# Altium PCB Nixie Valve Clock Power Supply Daughterboard.PcbDoc (part 1 of 2)
Units mm, origin at the board's own origin, x right, y up, seen from the top; angles counter-clockwise.
Board outline 55 x 51 mm, 2 copper layers (Top Layer, Bottom Layer), stack 1.57 mm thick; 45 components, 21 nets, 192 pads, 92 vias.
Unrouted connection lines stored in the file: 89.
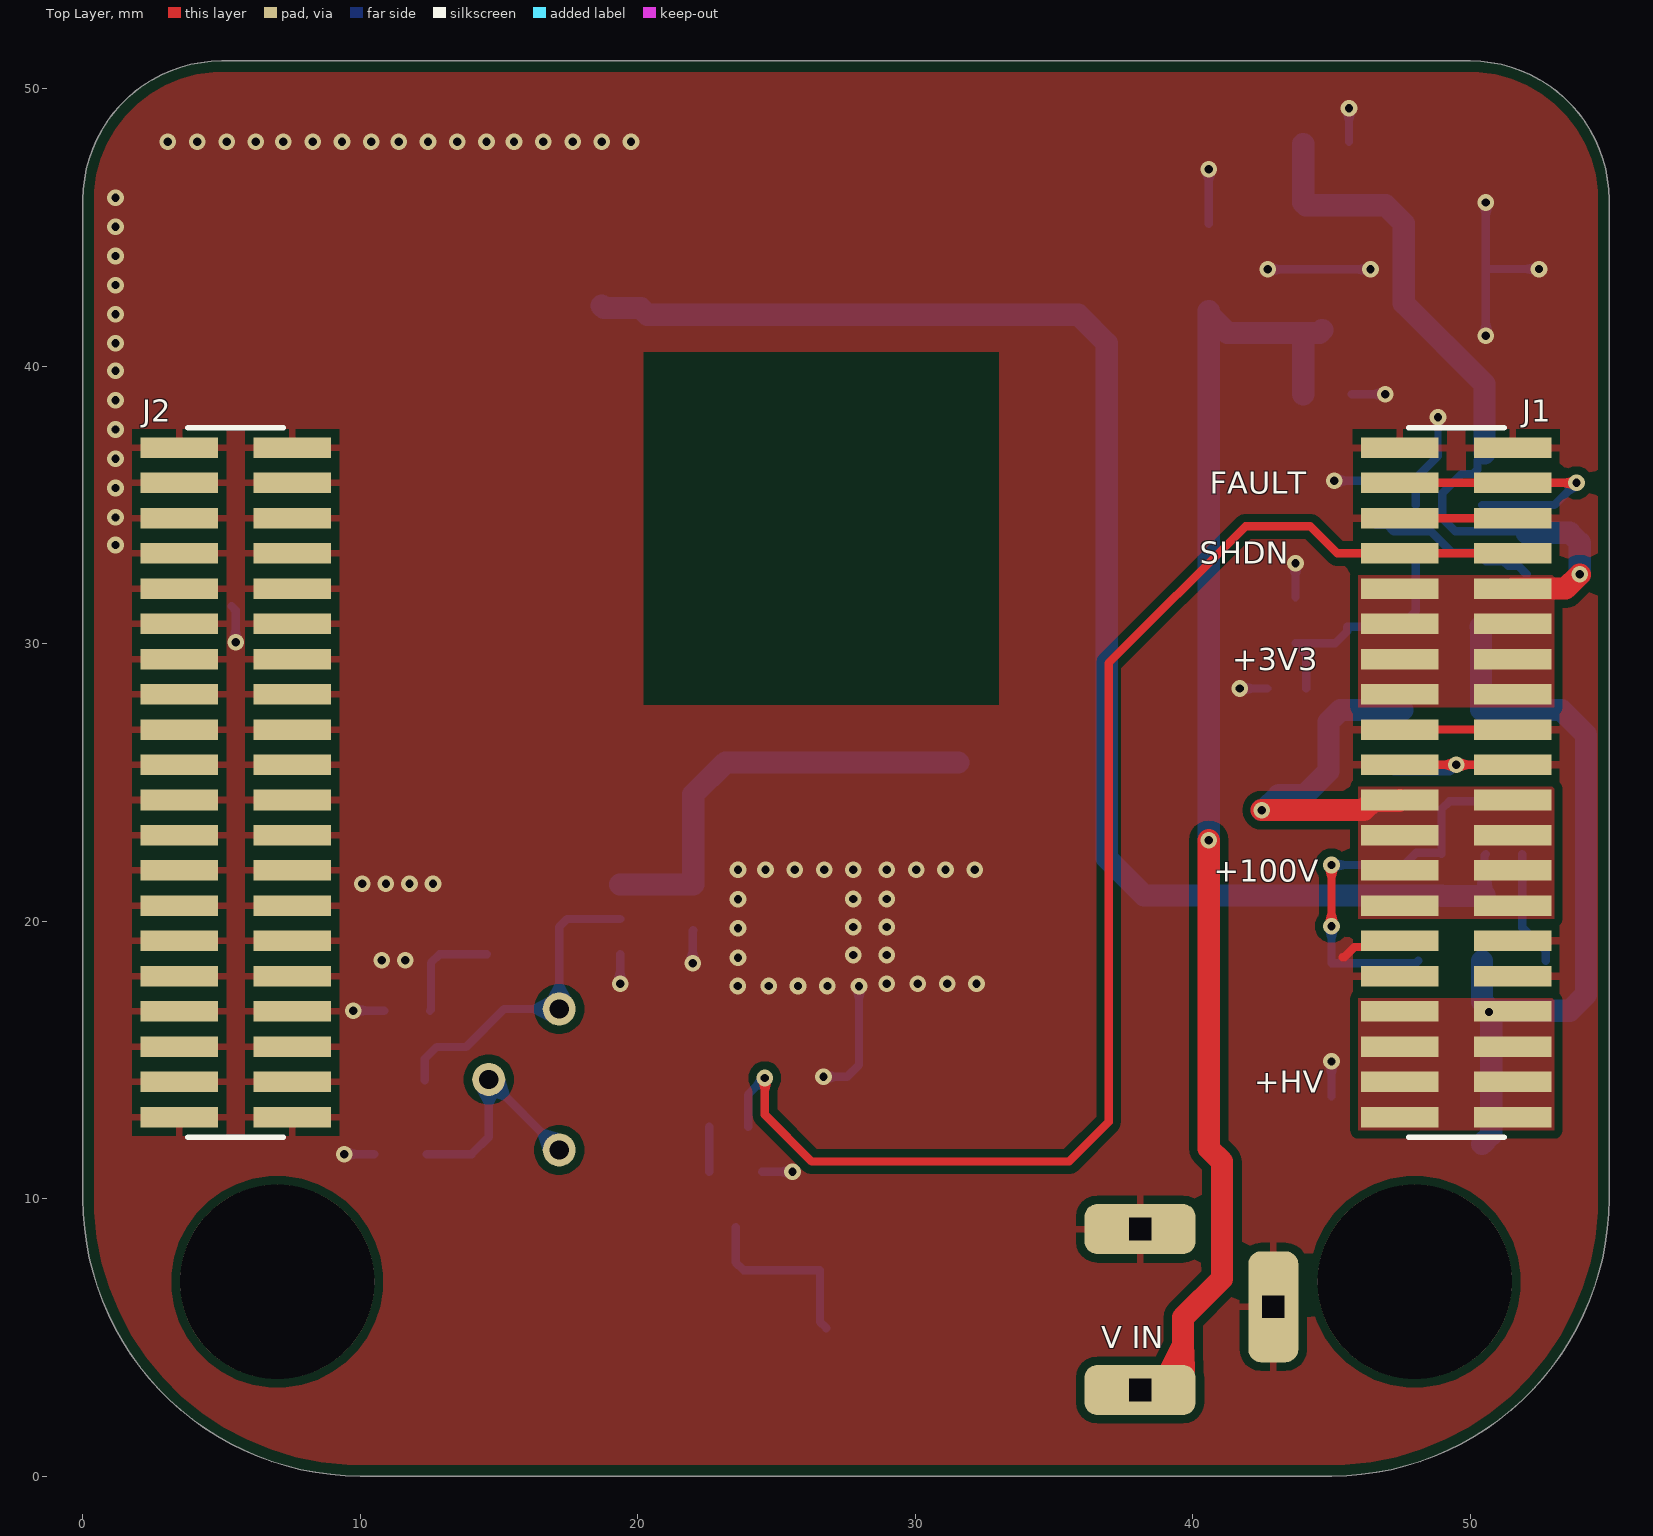
[diagram p0: Top Layer view]
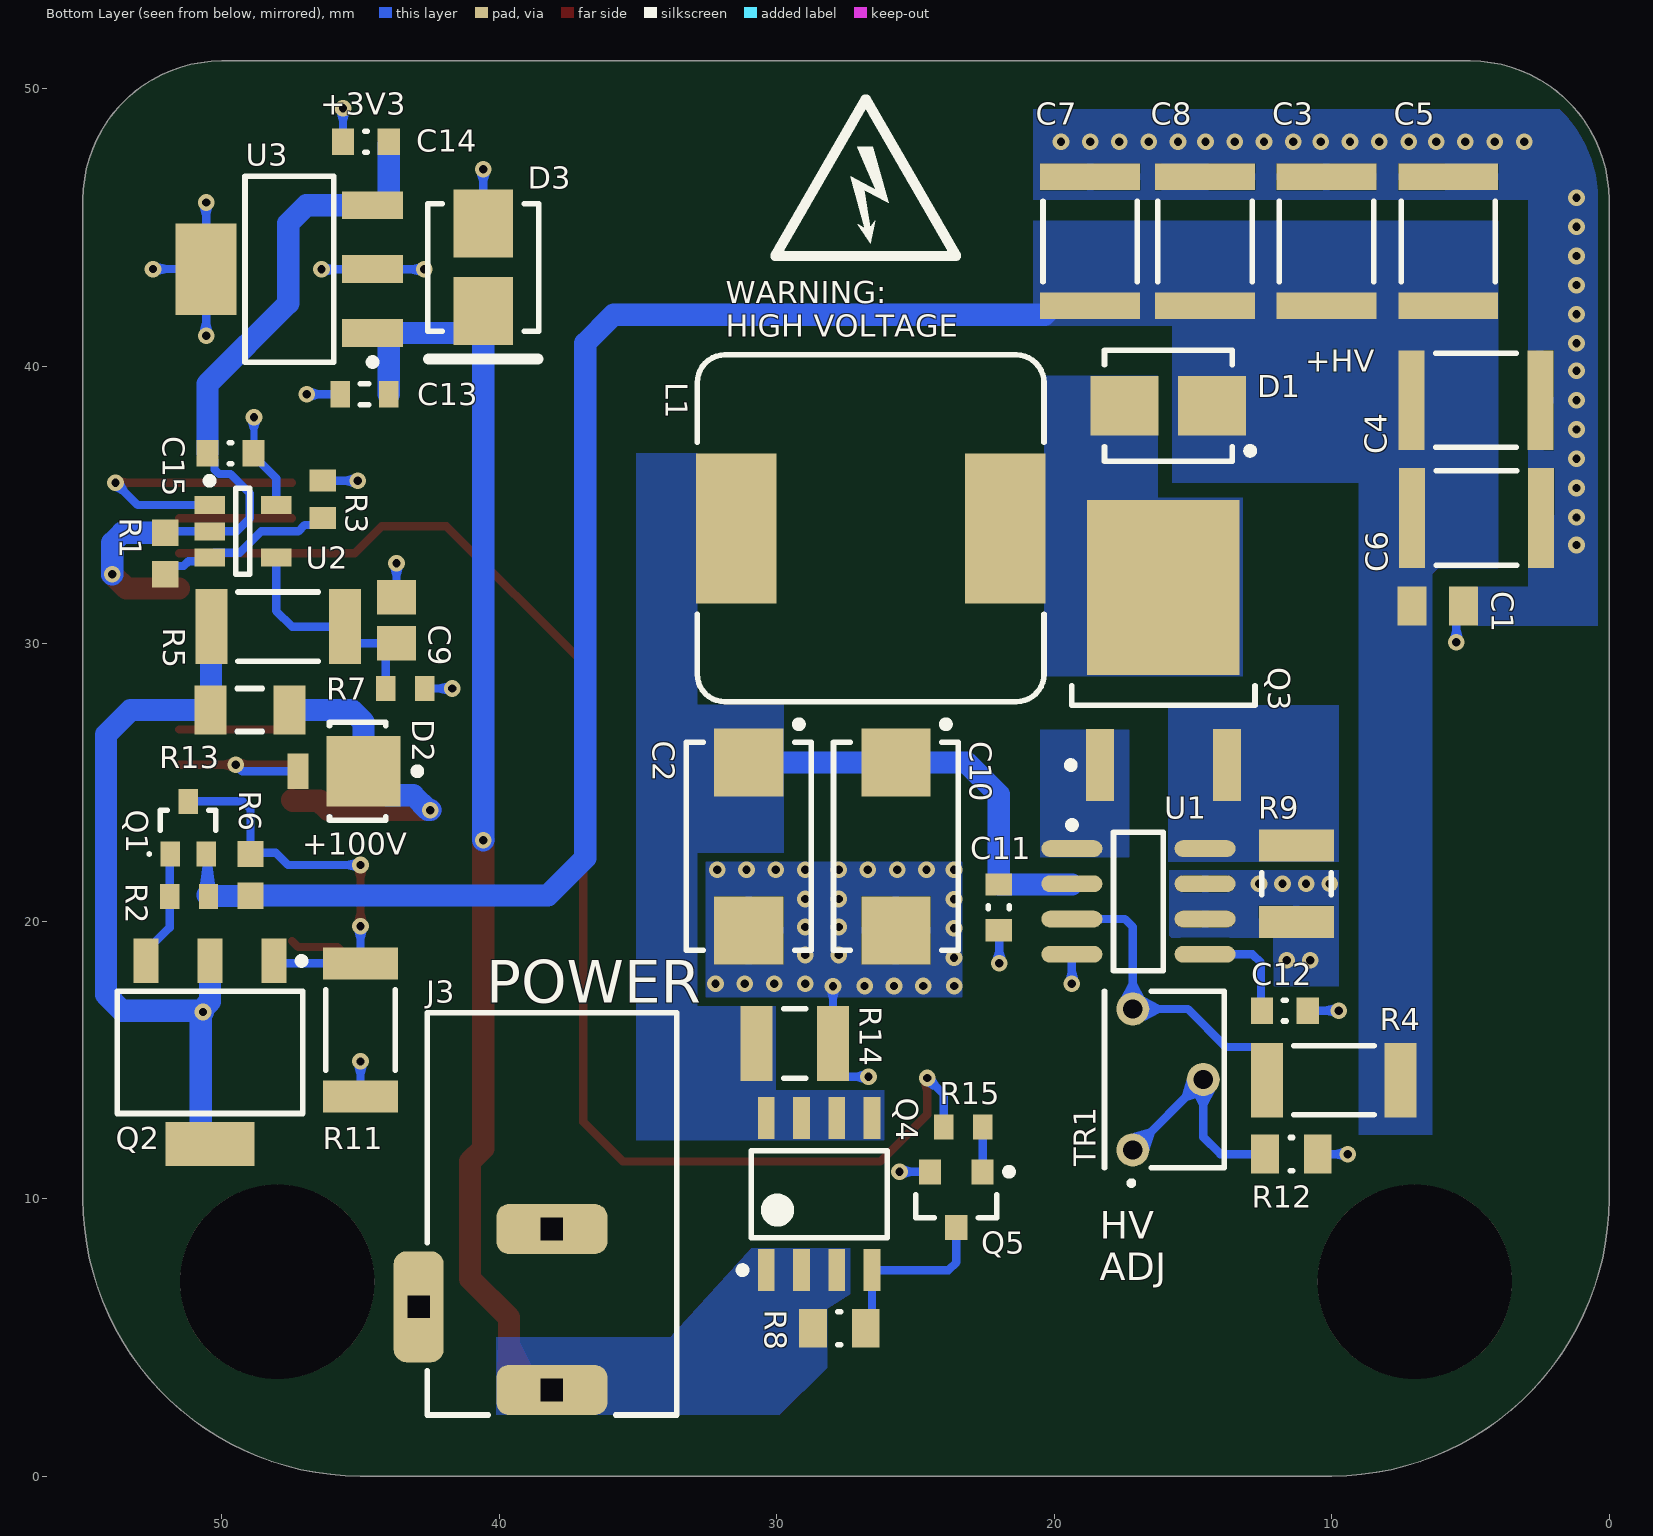
[diagram p1: Bottom Layer view, seen from below]
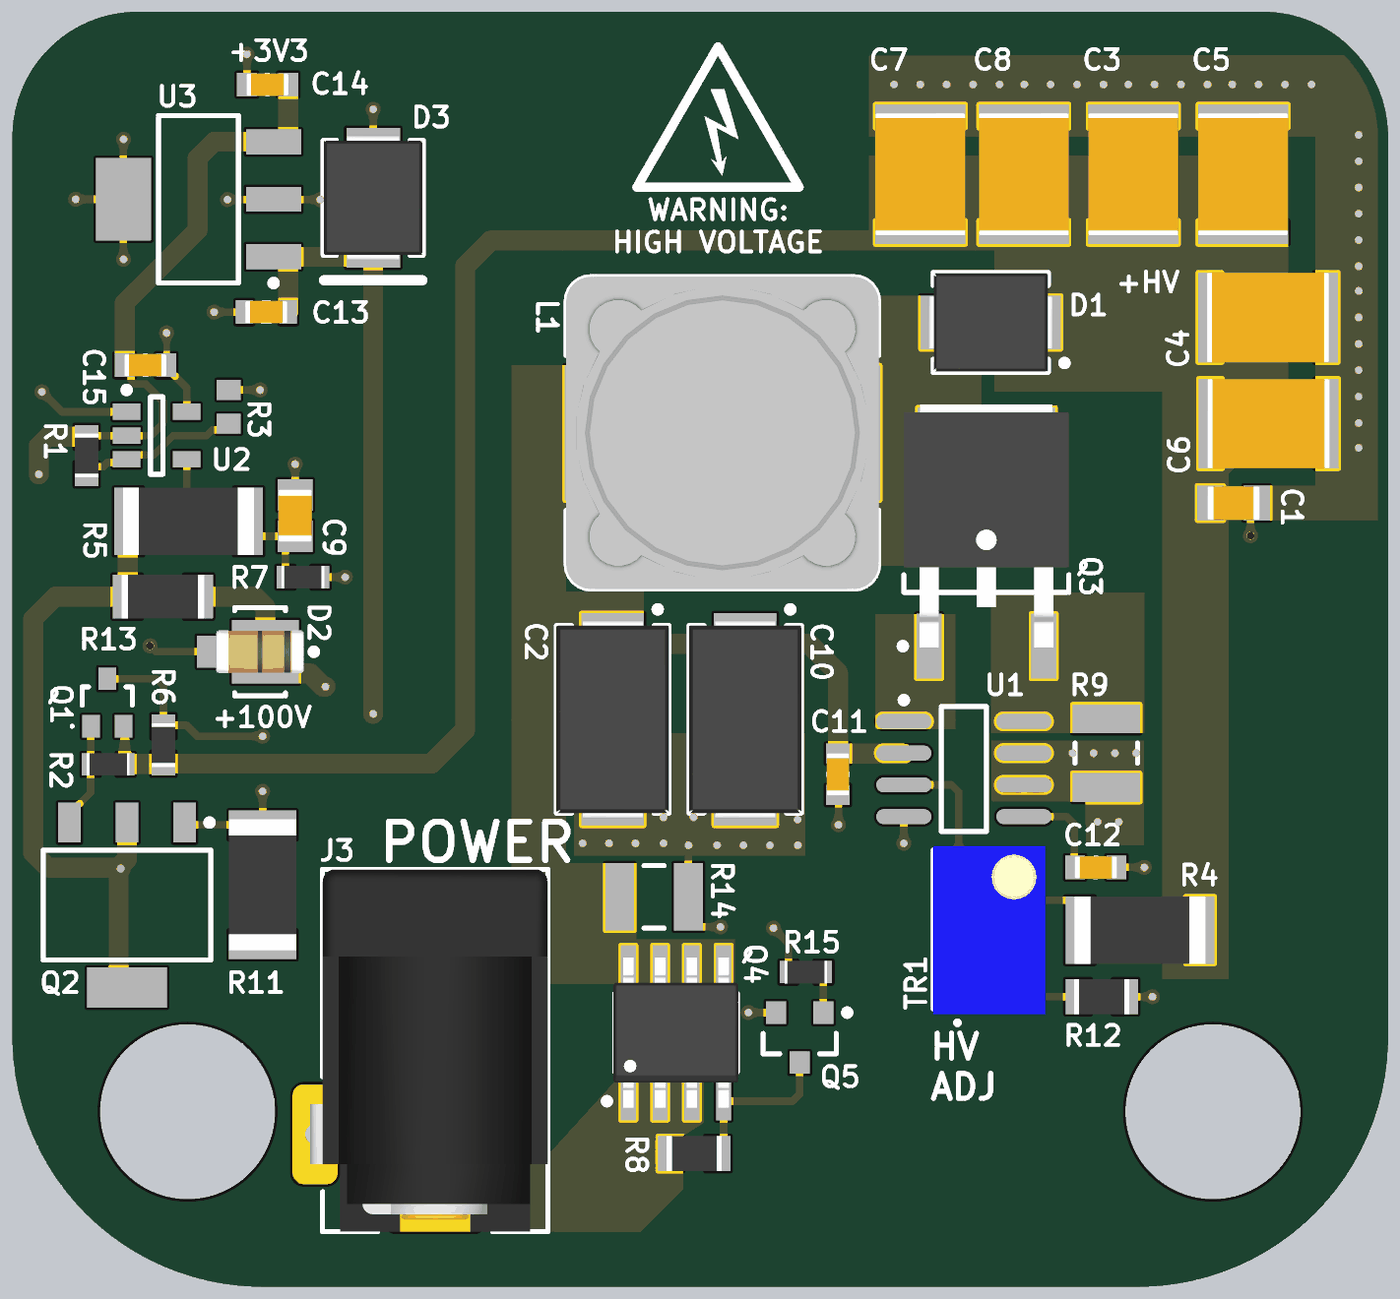
[diagram p2: 3D render of the assembled board from below, using the file's embedded part models]

## Layer stack, top to bottom
Top Solder: solder mask 0.01, SM-001, Dk 4
Top Layer: signal copper 0.035
Dielectric 1: core 1.5, Core-043, Dk 4.3
Bottom Layer: signal copper 0.035
Bottom Solder: solder mask 0.01, SM-001, Dk 4

## Board outline
10,0 45,0 ccw(c45,10) 55,10 55,46 ccw(c50,46) 50,51 5,51 ccw(c5,46) 0,46 0,10 ccw(c10,10)

## Design rules (kind name [scope] priority, off if disabled: settings)
BoardOutlineClearance [All] p1: gap=0.4 ignorepadtopadclearanceinfootprint=FALSE
Clearance Clearance_GND_PLANES [InPoly AND InNet('GND')] p1: gap=0.3 ignorepadtopadclearanceinfootprint=FALSE
Clearance Clearance_HV [InNetClass('HIGH VOLTAGE')] p2: gap=0.4 ignorepadtopadclearanceinfootprint=FALSE
Clearance Clearance_HV_100V [InNetClass('HIGH VOLTAGE 100V')] p3: gap=0.4 ignorepadtopadclearanceinfootprint=FALSE
Clearance Clearance_NPTH_to_Track [IsThruPin AND NOT(PadIsPlated) vs IsTrack] p4: gap=0.2 ignorepadtopadclearanceinfootprint=FALSE
Clearance Clearance_PTH_to_Track [IsTrack vs IsThruPin AND PadIsPlated] p5: gap=0.28 ignorepadtopadclearanceinfootprint=FALSE
Clearance Clearance_Via_to_Track [IsVia vs IsTrack] p6: gap=0.2 ignorepadtopadclearanceinfootprint=FALSE
Clearance Clearance_SMD_Pad_to_SMD_Pad [IsPad AND NOT(IsThruPin) vs IsPad AND NOT(IsThruPin)] p7: gap=0.15 ignorepadtopadclearanceinfootprint=FALSE
Clearance Clearance_Pad_to_Track [IsPad vs IsTrack] p8: gap=0.1 ignorepadtopadclearanceinfootprint=FALSE
Clearance Clearance_Inner_Cu_to_PTH [OnLayer('Inner 1') OR OnLayer('Inner 2') vs IsThruPin AND PadIsPlated] p9: gap=0.1 ignorepadtopadclearanceinfootprint=FALSE
Clearance Clearance_Inner_Cu_to_Vias [IsVia vs OnLayer('Inner 1') OR OnLayer('Inner 2')] p10: gap=1.95 ignorepadtopadclearanceinfootprint=FALSE
Clearance Clearance_Same_Nets [IsTrack vs IsTrack] p11: gap=0.25 ignorepadtopadclearanceinfootprint=FALSE
Clearance Minimum_Clearance [All] p12: gap=0.1 ignorepadtopadclearanceinfootprint=FALSE
HoleSize "Minimum Hole Size PTH" [(IsThruPin AND IsPad And PadIsPlated)] p1: absolutevalues=TRUE maxlimit=5 minlimit=0.3 maxpercent=80.000 minpercent=20.000
HoleSize "Minimum Hole Size VIA" [IsVia] p2: absolutevalues=TRUE maxlimit=5 minlimit=0.15 maxpercent=80.000 minpercent=20.000
HoleSize "Minimum Hole Size NPTH" [(IsThruPin AND IsPad And (NOT PadIsPlated))] p3: absolutevalues=TRUE maxlimit=10 minlimit=0.5 maxpercent=80.000 minpercent=20.000
HoleToHoleClearance ViaHoleToHoleClearance [IsVia vs IsVia] p1: gap=0.2 allowstackedmicrovias=TRUE
HoleToHoleClearance PadHoleToHoleClearance [IsPad vs IsPad] p2: gap=0.45 allowstackedmicrovias=TRUE
MinimumAnnularRing PTH_MinimumAnnularRing [(IsThruPin AND IsPad And PadIsPlated)] p1: minimumring=0.2
MinimumAnnularRing VIA_MinimumAnnularRing [IsVia] p2: minimumring=0.05
MinimumAnnularRing NPTH_MinimumAnnularRing [(IsThruPin AND IsPad And (NOT PadIsPlated))] p3: minimumring=0.45
MinimumSolderMaskSliver [All] p1: minsoldermaskwidth=0.1
PolygonConnect PolygonConnect_VIAS [IsVia] p1: connectstyle=Direct reliefconductorwidth=0.254 reliefentries=4 polygonreliefangle="90 Angle" airgapwidth=0.254
PolygonConnect [IsPoly AND NOT(InNet('GND'))] p2: connectstyle=Direct reliefconductorwidth=0.254 reliefentries=4 polygonreliefangle="90 Angle" airgapwidth=0.254
PolygonConnect PolygonConnect_Thermal_Relief [IsPoly AND (InNet('GND')) vs NOT(InComponent('C2') OR InComponent('C10') OR InComponent('C3') OR InComponent('C5') OR InComponent('C7') OR InComponent('C8') OR InComponent('C6') OR InComponent('C4') OR InComponent('U1') OR InComponent('R9') OR InComponent('C1'))] p3: connectstyle=Relief reliefconductorwidth=0.254 reliefentries=4 polygonreliefangle="90 Angle" airgapwidth=0.3
RoutingVias [All] p1: holewidth=0.3 width=0.6 viastyle="Through Hole" minholewidth=0.3 minwidth=0.6 maxholewidth=2 maxwidth=3
SilkToSilkClearance [All] p1: silktosilkclearance=0.1
SilkToSolderMaskClearance [All] p1: minsilkscreentomaskgap=0 clearancetoexposedcopper=FALSE
SolderMaskExpansion SolderMaskExpansion_Tented_Vias [IsVia] p1: expansion=0.1 istentingtop=TRUE
SolderMaskExpansion [All] p2: expansion=0.1 istentingtop=FALSE
SupplyNets "Schematic Supply Nets_4" [InNet('GND')] p1: voltage=0.000
SupplyNets "Schematic Supply Nets_2" [InNet('+3V3')] p2: voltage=0.000
SupplyNets "Schematic Supply Nets_3" [InNet('+9V')] p3: voltage=0.000
SupplyNets "Schematic Supply Nets_1" [InNet('+HV')] p4: voltage=0.000
SupplyNets "Schematic Supply Nets" [InNet('+100V')] p5: voltage=0.000
Width "Minimum Width" [All] p1: maxlimit=3 minlimit=0.1 preferedwidth=0.3
25 further rules are at their usual default settings.

## Classes and differential pairs
net class HV_Nets: CS EXT FB NetC9_1 NetQ1_1 NetQ1_3 NetQ4_4 NetQ5_1 NetR1_1 NetR12_2 REF SW_NODE VBOOST VIN
net class "HIGH VOLTAGE 100V": +100V
net class POWER: +3V3 GND
net class "HIGH VOLTAGE": +HV NetQ1_1 NetQ1_3 SW_NODE VBOOST
component class POWER: C13 C14 D3 J3 U3
component class "Nixie Valve Clock Power Supply Daughterboard": J1 J2
component class HV: C1 C2 C3 C4 C5 C6 C7 C8 C9 C10 C11 C12 C15 D1 D2 L1 Q1 Q2 Q3 Q4 Q5 R1 R2 R3 R4 R5 R6 R7 R8 R9 R11 R12 R13 R14 R15 TR1 U1 U2

## Components (designator, comment, footprint, x,y, rotation, side; value= is the part's Value field where it differs from the comment)
C1 "CC0805KKX7RYBB104" CAPC2013X95X50NL10T25-Wider-Spacing 6.175,31.351 r180 bottom value=100nF
C2 "TPSD107M016R0125" CAPMP7344X31N 31,22.695 r270 bottom value=100µF
C3 "CGA8P3X7T2E105K250KA" CAPC4532X28N 10.185,44.5 r90 bottom value=1µF
C4 "CGA8P3X7T2E105K250KA" CAPC4532X28N 4.796,38.773 r180 bottom value=1µF
C5 "CGA8P3X7T2E105K250KA" CAPC4532X28N 5.796,44.5 r90 bottom value=1µF
C6 "CGA8P3X7T2E105K250KA" CAPC4532X28N 4.775,34.525 r180 bottom value=1µF
C7 "CGA8P3X7T2E105K250KA" CAPC4532X28N 18.7,44.5 r90 bottom value=1µF
C8 "CGA8P3X7T2E105K250KA" CAPC4532X28N 14.559,44.5 r90 bottom value=1µF
C9 "CC0805KKX7RYBB104" CAPC2013X95X50NL10T25 43.698,30.844 r90 bottom value=100nF
C10 "TPSD106K035R0300" CAPMP7344X31N 25.7,22.695 r270 bottom value=10µF
C11 "CGA3E2X7R1H104K080AA" CAPC1608X09N 21.995,20.496 r270 bottom value=100nF
C12 "CGA3E2X7R1H104K080AA" CAPC1608X09N 11.684,16.775 r180 bottom value=100nF
C13 "C1608X7R1H334K080AC" CAPC1608X10N 44.851,38.987 r0 bottom value=330nF
C14 "CGA3E2X7R1H104K080AA" CAPC1608X09N 44.801,48.087 r0 bottom value=100nF
C15 "CGA3E2X7R1H104K080AA" CAPC1608X09N 49.684,36.861 r180 bottom value=100nF
D1 "ES2F-E3/5BT" DIOM4336X24N 15.884,38.575 r0 bottom
D2 "1PMT4135E3/TR7" FP-DO-216-MFG 45.1,25.4 r0 bottom
D3 "SS54BF-HF" JCET-SMB-2_N 40.576,43.562 r270 bottom
J1 "FTS-120-X-X-DV" SAMTEC_FTS-120-X-X-DV 49.5,25 r90 top locked
J2 "FTS-120-X-X-DV" SAMTEC_FTS-120-X-X-DV 5.5,25 r90 top locked
J3 "694106301002" 694106301002 38.1,9.45 r0 bottom
L1 "SRR1280-101M" BOUR-SRR1280-2_V 26.613,34.156 r180 bottom value=100µH
Q1 "BC807-25WT1G" ONSC-SC-70-3-419-04_V 51.211,23.368 r90 bottom
Q2 "BSP317PH6327XTSA1" INF-PG-SOT223_SC-73_N 50.422,15.266 r270 bottom
Q3 "STD18NF25" DPAK229P972X240-3N 16.059,29.775 r90 bottom
Q4 "SI4459BDY-T1-GE3" SI4459BDY-T1-GE3-Footprint-1 28.47,10.16 r90 bottom
Q5 "BC817-25-TP" SOT95P237X110-3N 23.525,9.965 r270 bottom
R1 "ERJ3EKF1202V" RESC1609X55X30NL15T15 52.035,33.247 r90 bottom value=12k
R2 "AC0603FR-077R5L" RESC1608X55X25NL10T15 51.176,20.895 r0 bottom value=7R5
R3 "ERJ3EKF2002V" RESC1608X55X30NL15T15 46.354,35.2 r270 bottom value=20k
R4 "CRMA2010AF1M50FKEF" RESC5125X07N 9.92,14.266 r180 bottom value=1.5M
R5 "5-2176330-3" RESC5125X07N 47.963,30.611 r0 bottom value=220kR
R6 "ERJ-3EKF5601V" RESC1609X55X30NL15T15 48.963,21.67 r270 bottom value=5.6k
R7 "ERJ-3RBD3301V" RESC1608X55X25NL10T15 43.387,28.383 r0 bottom value=3K3
R8 "Resistor 10k +/-1% 0805 125 mW" RESC2013X50X35NL15T15 27.741,5.329 r0 bottom value=10k
R9 "RL1210FR-070R025L" RESC3126X65X50NL10T20 11.265,21.345 r90 bottom value=25mR
R11 "5-2176347-6" RESC5125X07N 44.999,16.077 r90 bottom value=390kR
R12 "Resistor 10k +/-1% 0805 125 mW" RESC2013X50X35NL15T15 11.445,11.6 r0 bottom value=10k
R13 "CRCW1206150KFKEA" RESC3216X06N 48.986,27.608 r180 bottom value=150k
R14 "CRCW1210470RFKEAHP" RESC3126X65X50NL10T20 29.345,15.593 r0 bottom value=470R
R15 "Resistor 4k7 +/-1% 0603 100 mW" RESC1608X55X25NL10T15 23.275,12.585 r0 bottom value=4.7k
TR1 "3266W-1-502LF" 3266W-1-502LF-Footprint-1 16.025,14.293 r90 bottom value=5k
U1 "MAX1771CSA+" "Copy of ADI-R-8_N" 16.959,20.71 r180 bottom
U2 "MCP6541RT-I/OT" SOT-23-OT5_N 49.236,34.047 r180 bottom
U3 "UA78M33CDCYG3" SOT-223-DB3_N 47.561,43.5 r0 bottom

## Footprints (in the part's own frame and the unit in brackets; to place one, negate y for a bottom-side part, rotate by r counter-clockwise, add the part's x,y. Pads: shape width x height; smd on the part's side, far side on the other; paste and mask are expansions set on the pad)
3266W-1-502LF-Footprint-1 [mm]
  round 1.19 hole 0.69: 1(-2.54,1.139) 2(0,-1.401) 3(2.54,1.139)
  silkscreen extent -3.81,-2.15 3.17,2.16, body extent -3.39,-2.34 3.31,2.16, height 8.52
694106301002 [mm] "DC Power Jack Right Angled(6.4)"
  rrect50% 4x1.8 hole 0.8 square: 1(0,6.35) 2(0,0.55)
  rrect50% 1.8x4 hole 0.8 square: 3(4.8,3.35)
  silkscreen extent -4.5,-7.25 4.5,7.25, body extent -4.5,-7.25 5,7.25, height 10.75
BOUR-SRR1280-2_V [mm] "SMD, 2-Leads, Body 12.5x12.5mm"
  rect 2.9x5.4 smd: 1(-4.85,0) 2(4.85,0)
  silkscreen extent -6.25,-6.25 6.25,6.25, body extent -6.25,-6.25 6.25,6.25, height 7.51
CAPC1608X09N [mm] "Chip Capacitor, 2-Leads, Body 1.60x0.80mm, IPC Medium Density"
  rect 0.8x0.95 smd: 1(-0.825,0) 2(0.825,0)
  silkscreen extent -0.05,-0.38 0.05,0.38, body extent -0.85,-0.45 0.85,0.45, height 0.9
CAPC1608X10N [mm] "Chip Capacitor, 2-Leads, Body 1.60x0.80mm, IPC Medium Density"
  rect 0.7x0.95 smd: 1(-0.875,0) 2(0.875,0)
  silkscreen extent -0.15,-0.38 0.15,0.38, body extent -0.85,-0.45 0.85,0.45, height 1
CAPC2013X95X50NL10T25 [mm] "Chip Capacitor, 2-Leads, Body 2.10x1.35mm, IPC Medium Density"
  rect 1.25x1.4 smd: 1(-0.825,0) 2(0.825,0)
  body extent -1.05,-0.67 1.05,0.67, height 0.95
CAPC2013X95X50NL10T25-Wider-Spacing [mm] "Chip Capacitor, 2-Leads, Body 2.10x1.35mm, IPC Medium Density"
  rect 1.05x1.4 smd: 1(-0.925,0) 2(0.925,0)
  body extent -1.05,-0.67 1.05,0.67, height 0.95
CAPC4532X28N [mm] "Chip Capacitor, 2-Leads, Body 4.50x3.20mm, IPC Medium Density"
  rect 0.95x3.6 smd: 1(-2.325,0) 2(2.325,0)
  silkscreen extent -1.45,-1.7 1.45,1.7, body extent -2.45,-1.8 2.45,1.8, height 2.8
CAPMP7344X31N [mm] "Molded Capacitor, 2-Leads, Body 7.30x4.35mm, IPC Medium Density"
  rect 2.45x2.5 smd: 1(-3.025,0) 2(3.025,0)
  silkscreen extent -4.52,-2.25 3.75,2.25, body extent -3.97,-2.25 3.97,2.25, height 3.1
"Copy of ADI-R-8_N" [mm] "SOIC, 8-Leads, Body 4.9x3.9mm, Pitch 1.27mm, IPC Medium Density"
  oval 2.2x0.6 smd: 1(-2.4,1.905) 2(-2.4,0.635) 3(-2.4,-0.635) 4(-2.4,-1.905) 5(2.4,-1.905) 6(2.4,-0.635) 7(2.4,0.635) 8(2.4,1.905)
  silkscreen extent -2.53,-2.5 0.9,2.88, body extent -2,-2.5 2,2.5, height 1.75
DIOM4336X24N [mm] "Molded Diode, 2-Leads, Body 4.31x3.62mm, IPC Medium Density"
  rect 2.45x2.15 smd: 1(-1.575,0) 2(1.575,0)
  silkscreen extent -3.07,-2 2.3,2, body extent -2.5,-1.97 2.5,1.97, height 2.44
DPAK229P972X240-3N [mm] "D-PAK, 3-Pads, Body 6.20x6.66mm (max), IPC Medium Density"
  rect 2.6x1 smd: 1(-4.15,2.29) 3(-4.15,-2.29)
  rect 6.3x5.5 smd: 4(2.25,0)
  silkscreen extent -4.27,-3.3 -1.3,3.47, body extent -4.2,-3.3 5.53,3.3, height 2.43
FP-DO-216-MFG [mm]
  rect 2.67x2.54 smd: 1(-0.21,0)
  rect 0.76x1.27 smd: 2(2.145,0)
  silkscreen extent -2.27,-1.77 1.01,1.76, body extent -1.75,-0.85 1.75,0.85, height 1.7
INF-PG-SOT223_SC-73_N [mm] "SOT223, 4-Leads, Body 6.5x3.5mm, Pitch 2.3mm, IPC Medium Density"
  rect 1.6x0.9 smd: 1(-3.3,2.3) 2(-3.3,0) 3(-3.3,-2.3)
  rect 1.6x3.2 smd: 4(3.3,0)
  silkscreen extent -3.42,-3.35 2.2,3.42, body extent -1.85,-3.35 1.85,3.35, height 1.8
JCET-SMB-2_N [mm] "Molded Diode, 2-Leads, Body 4.57x3.94mm"
  rect 2.45x2.15 smd: 1(-1.575,0) 2(1.575,0)
  silkscreen extent -2.3,-2 3.3,2, body extent -2.5,-1.97 2.5,1.97, height 2.44
ONSC-SC-70-3-419-04_V [mm] "SOT23, 3-Leads, Body 2x1.25mm, Pitch 0.65mm"
  rect 0.9x0.7 smd: 1(-0.95,0.65) 2(-0.95,-0.65) 3(0.95,0)
  silkscreen extent -1,-1 0.63,1.45, body extent -0.63,-1 0.63,1, height 1
RESC1608X55X25NL10T15 [mm] "Chip Resistor, 2-Leads, Body 1.70x0.90mm, IPC Medium Density"
  rect 0.7x0.9 smd: 1(-0.7,0) 2(0.7,0)
  body extent -0.85,-0.45 0.85,0.45, height 0.55
RESC1608X55X30NL15T15 [mm] "Chip Resistor, 2-Leads, Body 1.60x0.80mm, IPC Medium Density"
  rect 0.8x0.95 smd: 1(-0.675,0) 2(0.675,0)
  body extent -0.87,-0.48 0.87,0.48, height 0.55
RESC1609X55X30NL15T15 [mm] "Chip Resistor, 2-Leads, Body 1.75x0.95mm, IPC Medium Density"
  rect 0.95x0.95 smd: 1(-0.75,0) 2(0.75,0)
  body extent -0.87,-0.48 0.87,0.48, height 0.55
RESC2013X50X35NL15T15 [mm] "Chip Resistor, 2-Leads, Body 2.2x1.4mm, IPC Medium Density"
  rect 1x1.4 smd: 1(-0.95,0) 2(0.95,0)
  silkscreen extent -0.05,-0.6 0.05,0.6, body extent -1.1,-0.7 1.1,0.7, height 0.5
RESC3126X65X50NL10T20 [mm] "Chip Resistor, 2-Leads, Body 3.10x2.60mm, IPC Medium Density"
  rect 1.15x2.7 smd: 1(-1.375,0) 2(1.375,0)
  silkscreen extent -0.4,-1.25 0.4,1.25, body extent -1.6,-1.35 1.6,1.35, height 0.65
RESC3216X06N [mm] "Chip Resistor, 2-Leads, Body 3.15x1.60mm, IPC Medium Density"
  rect 1.15x1.75 smd: 1(-1.425,0) 2(1.425,0)
  silkscreen extent -0.45,-0.77 0.45,0.77, body extent -1.65,-0.87 1.65,0.87, height 0.6
RESC5125X07N [mm] "Chip Resistor, 2-Leads, Body 5.08x2.54mm, IPC Medium Density"
  rect 1.15x2.7 smd: 1(-2.4,0) 2(2.4,0)
  silkscreen extent -1.45,-1.25 1.45,1.25, body extent -2.62,-1.35 2.62,1.35, height 0.74
SAMTEC_FTS-120-X-X-DV [mm]
  rect 0.74x2.79 smd: 1(-12.065,-2.035) 2(-12.065,2.035) 3(-10.795,-2.035) 4(-10.795,2.035) 5(-9.525,-2.035) 6(-9.525,2.035) 7(-8.255,-2.035) 8(-8.255,2.035) 9(-6.985,-2.035) 10(-6.985,2.035) 11(-5.715,-2.035) 12(-5.715,2.035) 13(-4.445,-2.035) 14(-4.445,2.035) 15(-3.175,-2.035) 16(-3.175,2.035) 17(-1.905,-2.035) 18(-1.905,2.035) 19(-0.635,-2.035) 20(-0.635,2.035) 21(0.635,-2.035) 22(0.635,2.035) 23(1.905,-2.035) 24(1.905,2.035) 25(3.175,-2.035) 26(3.175,2.035) 27(4.445,-2.035) 28(4.445,2.035) 29(5.715,-2.035) 30(5.715,2.035) 31(6.985,-2.035) 32(6.985,2.035) 33(8.255,-2.035) 34(8.255,2.035) 35(9.525,-2.035) 36(9.525,2.035) 37(10.795,-2.035) 38(10.795,2.035) 39(12.065,-2.035) 40(12.065,2.035)
  silkscreen extent -12.79,-1.72 12.79,1.72, body extent -12.7,-2.92 12.7,2.92, height 3.17
SI4459BDY-T1-GE3-Footprint-1 [mm]
  rect 1.52x0.6 smd: 1(-2.74,1.905) 2(-2.74,0.635) 3(-2.74,-0.635) 4(-2.74,-1.905) 5(2.74,-1.905) 6(2.74,-0.635) 7(2.74,0.635) 8(2.74,1.905)
  silkscreen extent -2.86,-2.45 1.57,2.89, body extent -3,-2.5 3,2.5, height 1.75
SOT95P237X110-3N [mm] "SOT23, 3-Leads, Body 2.92x2.37mm, Pitch 0.95mm, IPC Medium Density"
  rect 0.9x0.8 smd: 1(-1,0.95) 2(-1,-0.95) 3(1,0)
  silkscreen extent -1.12,-1.46 0.65,2.02, body extent -0.65,-1.46 0.65,1.46, height 1.11
SOT-23-OT5_N [mm] "SOT23, 5-Leads, Body 2.9x1.7mm, Pitch 0.95mm, Lead Span 2.8mm, IPC Medium Density"
  rect 1.1x0.65 smd: 1(-1.2,0.95) 2(-1.2,0) 3(-1.2,-0.95) 4(1.2,-0.95) 5(1.2,0.95)
  silkscreen extent -1.33,-1.55 0.25,1.95, body extent -0.9,-1.55 0.9,1.55, height 1.45
SOT-223-DB3_N [mm] "SOT223, 4-Leads, Body 6.5x3.5mm, Pitch 2.3mm, Lead Span 7mm, IPC Medium Density"
  rect 2.2x1 smd: 1(-3,2.3) 2(-3,0) 3(-3,-2.3)
  rect 2.2x3.3 smd: 4(3,0)
  silkscreen extent -3.12,-3.35 1.6,3.47, body extent -1.85,-3.35 1.85,3.35, height 1.8

## Part data
C1 C9: library part CMP-00390-2, "Ceramic Capacitor, Ceramic, 250V, 10% +Tol, 10% -Tol, X7R, 15% TC, 0.1uF, Surface Mount, 0805", Case/Package=0805, Dielectric=X7R, Dielectric Material=Ceramic, Max Operating Temperature=125°C, Min Operating Temperature=-55°C, Tolerance=10%, Voltage Rating=250V, China RoHS=Compliant, Height=1.25mm, Length=2mm, Lifecycle Status=Production, Material=Ceramic, Mounting Technology="Surface Mount", Number of Terminals=2, Pins=2, REACH SVHC=Yes, RoHS=Compliant, RoHS Compliant=Yes, Voltage Rating (DC)=250V, Width=1.25mm
C2: library part CMP-001-00157-2, "Cap Tant Solid 100uF 16V D CASE 20% (7.3 X 4.3 X 2.9mm) SMD 7343-31 0.125 Ohm 125AHA T/R", Capacitor Type="Tantalum Capacitor", Case Code (Imperial)=2917, Case Code (Metric)=7343, Dielectric=Tantalum, ESR (Equivalent Series Resistance)=125mΩ, Leakage Current=16µA, Max Operating Temperature=125°C, Min Operating Temperature=-55°C, Ripple Current=438mA, Tolerance=20%, Voltage=16V, Case/Package=2917, China RoHS=Compliant, Depth=4.3mm, Dielectric Material=Tantalum, Dissipation Factor=6%, Features="General Purpose", Height=2.9mm, Height - Seated (Max)=3.0988mm, Lead Free="Lead Free", Lead Pitch=4.4mm, Length=7.3mm, Lifecycle Status=Production, Mounting Technology="Surface Mount", Number of Terminals=2, Pins=2, Polarity=Polar, Radiation Hardening=No, REACH SVHC=Yes, RoHS=Compliant, RoHS Compliant=Yes, Schedule B=8532210050, Termination=SMD/SMT, Voltage Rating=16V, Voltage Rating (DC)=16V, Width=4.3mm
C3 C4 C5 C6 C7 C8: library part CMP-001-00159-1, "CGA Series 1812 1 uF 250 V ±10 % Tolerance X7T SMT Multilayer Ceramic Capacitor", Capacitor Type=MLCC, Case Code (Imperial)=1812, Case Code (Metric)=4532, Dielectric=X7T, Dielectric Material=Ceramic, Manufacturer Lifecycle Status=PRODUCTION, Max Operating Temperature=125°C, Min Operating Temperature=-55°C, Ratings=AEC-Q200, Tolerance=10%, Voltage Rating=250V, Case/Package=1812, China RoHS=Compliant, Composition=Ceramic, Depth=3.2mm, Height=2.5mm, Length=4.5mm, Lifecycle Status=Production, Material=Ceramic, Max Length=4.9mm, Max Width=3.6mm, Min Length=4.1mm, Min Width=2.8mm, Mounting Technology="Surface Mount", Number of Terminals=2, Pins=2, REACH SVHC=Yes, RoHS=Compliant, RoHS Compliant=Yes, Schedule B="8532240020, 8532240020", Termination=SMD/SMT, Thickness=2.4892mm, Voltage Rating (DC)=250V, Weight=26.988746mg, Width=3.2mm
C10: library part CMP-001-00158-1, "Capacitor Tantalum Solid 10uF 35V D CASE 10% (7.3 X 4.3 X 2.9mm) SMD 7343-31 0.3 Ohm 125C T/R", Capacitor Type=Tantalum, Case Code (Imperial)=2917, Case Code (Metric)=7343, ESR (Equivalent Series Resistance)=300mΩ, Leakage Current=3.5µA, Max Operating Temperature=125°C, Min Operating Temperature=-55°C, Ripple Current=283mA, Tolerance=10%, Voltage=35V, Approvals=IEC, Case/Package=2917, China RoHS=Compliant, Depth=4.3mm, Dielectric=Tantalum, Dielectric Material=Tantalum, Dissipation Factor=6%, Features="General Purpose", Height=2.9mm, Height - Seated (Max)=3.0988mm, Lead Free="Lead Free", Length=7.3mm, Lifecycle Status=Production, Mounting Technology="Surface Mount", Number of Terminals=2, Packaging="Cut Tape", Pins=2, Polarity=Polar, Radiation Hardening=No, REACH SVHC=Yes, RoHS=Compliant, Schedule B="8532210050, 8532210050", Termination=SMD/SMT, Voltage Rating=35V, Voltage Rating (AC)=35V, Voltage Rating (DC)=35V, Weight=670.01263mg, Width=4.3mm
C11 C12 C14 C15: library part CMP-001-00101-1, "Ceramic Capacitor, Multilayer, Ceramic, 50V, 10% +Tol, 10% -Tol, X7R, 15% TC, 0.1uF, Surface Mount, 0603", Capacitor Type=Ceramic, Case/Package=0603, Dielectric=X7R, Max Operating Temperature=125°C, Min Operating Temperature=-55°C, Package Shape=Rectangular, Package Style=SMTMeter, Rated DC Voltage (URdc)=50V, Tolerance=10%, Dielectric Material=Ceramic, Height=0.8mm, JESD-609 Code=e3, Length=1.6mm, Mounting Technology="Surface Mount", Multilayer=Yes, Packaging="Tape and Reel", Pins=2, Reach SVHC Compliant=Yes, Reference Standard=AEC-Q200, RoHS Compliant=Yes, Temperature Characteristics Code=X7R, Terminal Finish=Nickel, Termination=Wraparound, Tolerance  (fill in as +-)=10%, Tolerance (fill in as +-)=10%, Voltage Rating=50V, Width=0.8mm
C13: library part CMP-001-00114-1, "Ceramic Capacitor, Multilayer, Ceramic, 50V, 10% +Tol, 10% -Tol, X7R, 15% TC, 0.33uF, Surface Mount, 0603", Capacitor Type=Ceramic, Case/Package=0603, Dielectric=X7R, Max Operating Temperature=125°C, Min Operating Temperature=-55°C, Package Shape=Rectangular, Package Style=SMTMeter, Rated DC Voltage (URdc)=50V, Tolerance=10%, Dielectric Material=Ceramic, Height=0.8mm, JESD-609 Code=e3, Length=1.6mm, Mounting Technology="Surface Mount", Multilayer=Yes, Packaging="Tape and Reel", Pins=2, Reach SVHC Compliant=Yes, RoHS Compliant=Yes, Temperature Characteristics Code=X7R, Terminal Finish=Nickel, Termination=Wraparound, Tolerance  (fill in as +-)=10%, Tolerance (fill in as +-)=10%, Voltage Rating=50V, Width=0.8mm
D1: library part CMP-004-00061-1, "Rectifier Diode, 1 Phase, 1 Element, 2A, 300V V(RRM), Silicon, DO-214AA", Average Rectified Current=2A, Case/Package=SMB, Forward Voltage=1.1V, Max Forward Surge Current (Ifsm)=50A, Max Operating Temperature=150°C, Max Repetitive Reverse Voltage (Vrrm)=300V, Min Operating Temperature=-55°C, Peak Reverse Current=10µA, China RoHS=Non-Compliant, Element Configuration=Single, Forward Current=2A, Lifecycle Status=Production, Max Output current=2A, Max Reverse Voltage (DC)=300V, Max Surge Current=50A, Mounting Technology="Surface Mount", Number of Elements=1, Number of Terminals=2, Peak Non-Repetitive Surge Current=50A, Pins=2, Radiation Hardening=No, REACH SVHC=No, Recovery Time=35ns, Reverse Recovery Time=50ns, Reverse Standoff Voltage=300V, Reverse Voltage=300V, RoHS=Compliant, RoHS Compliant=Yes
D2: library part CMP-004-00063-1, "Diode Zener Single 100V 5% 1W 2-Pin(1+Tab) Power Mite T/R", Case/Package=DO-216-2, Forward Voltage=1.1V, Max Junction Temperature (Tj)=150°C, Max Power Dissipation=1W, Max Reverse Leakage Current=10nA, Min Operating Temperature=-55°C, Reverse Voltage=76V, Tolerance=5%, Zener Voltage=100V, Contact Plating=Tin, Country of Assembly=Philippines, Country of Fabrication=Taiwan, Country of Origin=PHL, Element Configuration=Single, Export Control Classification Number (ECCN) Code=EAR99, Harmonized Tariff Schedule (HTS) Code=8541.10.0050, Height=1.14mm, Impedance=250Ω, Length=2.03mm, Lifecycle Status=Production, Max Operating Temperature=150°C, Mounting Technology="Surface Mount", Packaging="Tape & Reel (TR)", Peak Reverse Current=10nA, Power Dissipation=1W, Projected EOL Date=2049-02-02, RoHS=Compliant, Voltage Tolerance=5%, Zener Current=10nA
D3: library part CMP-004-00006-3, "Rectifier Diode, Schottky, 1 Phase, 1 Element, 5A, 40V V(RRM), Silicon", Case/Package=SMB-2, Forward Voltage=550mV, Manufacturer=JCET, Max Forward Surge Current (Ifsm)=120A, Max Operating Temperature=150°C, Max Output current=5A, Min Operating Temperature=-55°C, Package Description="2-Pin Surface Mount Device, Body 4.315 x 3.62 mm", Peak Reverse Current=1mA, Reverse Standoff Voltage=40V, Datasheet URL=http://wiki.seeedstudio.com/images/3/3f/0310130P1.pdf, Datasheet Version=May-13, Lifecycle Status=Production, Manufacturer URL=http://www.cj-elec.com/, Mounting Technology=SM, Number of Elements=1, Number of Terminals=2, Package Reference=SMB-2, REACH SVHC=Yes, RoHS=Compliant, RoHS Compliant=Unknown
J1 J2: library part CMP-002-00205-3, "Pin Header, Board-to-Board, 1.27 mm, 2 Rows, 40 Contacts, Surface Mount, FTS Series", Case/Package=None, Current Rating=1.75A, Housing Color=Black, Manufacturer Lifecycle Status=PRODUCTION, Max Operating Temperature=125°C, Min Operating Temperature=-55°C, Check_prices=https://www.snapeda.com/parts/FTS-120-04-G-DV-P/Samtec/view-part/?ref=eda, Component Type=Standard, Contact Material=Bronze, Contact Plating=Gold, Depth=3.42mm, Design Item ID=FTS-120-X-X-DV, Gender=Male, Housing Material=Polymer, Length=25.4mm, Lifecycle Status=Production, MF=Samtec, Mounting Technology="Surface Mount", MP=FTS-120-02-L-DV, Number of Contacts=40, Number of Rows=2, Orientation=Straight, Pins=40, Pitch=1.27mm, REACH SVHC=No, RoHS=Compliant, SnapEDA_Link=https://www.snapeda.com/parts/FTS-120-04-G-DV-P/Samtec/view-part/?ref=snap, Source=FTS-120-X-X-DV.SchLib, Termination=Solder
J3: library part CMP-002-00210-1, "DC Power Jack Connector WR-DC, Male, Right Angled, THT, 5 A, 24 V", Color=Black, Current Rating=5A, Flammability Rating="UL94 V-0", Insulation Resistance=100MΩ, Max Operating Temperature=85°C, Min Operating Temperature=-40°C, Operating Supply Voltage=24V, Connector Type=Power, Contact Gender=Female, Contact Material="Gold, Tin", Contact Plating=Tin, Gender=Male, Height=11mm, Housing Material=Polyamide, Max Current Rating=5A, Mounting Technology="Through Hole", Number of Contacts=3, Packaging=Bulk, Pins=3, REACH SVHC=Unknown, RoHS=Compliant, RoHS Compliant=Yes, Shielding=Unshielded, Termination="Through Hole", Voltage Rating=24V
L1: library part CMP-006-00066-1, "Inductor Power Shielded Wirewound 100uH 20% 1KHz 18Q-Factor Ferrite 2.1A 0.15Ohm DCR T/R", Case/Package=Nonstandard, Current Rating=2.1A, DC Resistance (DCR)=150mΩ, Frequency=4.5MHz, Inductance Tolerance=20%, Max Operating Temperature=125°C, Min Operating Temperature=-40°C, Saturation Current=2A, Test Frequency=1kHz, China RoHS=Compliant, Composition=Wirewound, Contact Plating=Tin, Core Material=Ferrite, DC Current=2.1A, Depth=12.8mm, Height=7.5mm, Height - Seated (Max)=8.001mm, Length=12.5mm, Lifecycle Status=Production, Material=Steel, Max Current Rating=2.1A, Max DC Current=2.1A, Military Standard=Not, Mounting Technology="Surface Mount", Number of Circuits=1, Number of Terminals=2, Packaging="Tape & Reel", Q Factor=18, Radiation Hardening=No, REACH SVHC=Yes, RMS Current (Irms)=2.1A, RoHS=Compliant, RoHS Compliant=Yes, Schedule B="8504500000, 8504500000", Self Resonant Frequency=4.5MHz, Shielding=Yes, Termination=SMD/SMT, Tolerance=20%, Width=12.5mm
Q1: library part CMP-013-00064-1, "Small Signal Bipolar Transistor, 0.5A I(C), 45V V(BR)CEO, 1-Element, PNP, Silicon", Case/Package=SC, Clock Frequency=100MHz, Collector Base Voltage (VCBO)=50V, Collector Emitter Breakdown Voltage=45V, Collector Emitter Saturation Voltage=-700mV, Emitter Base Voltage (VEBO)=5V, Manufacturer Lifecycle Status=ACTIVE, Max Collector Current=500mA, Max Operating Temperature=150°C, Max Power Dissipation=460mW, Min Operating Temperature=-55°C, China RoHS=Compliant, Collector Emitter Voltage (VCEO)=45V, Contact Plating=Tin, Element Configuration=Single, Frequency=100MHz, Halogen Free="Halogen Free", Height=900µm, hFE Min=160, Lead Free="Lead Free", Length=2.2mm, Lifecycle Status=Production, Max Breakdown Voltage=45V, Number of Elements=1, Number of Terminals=3, Packaging="Tape and Reel", Pins=3, Polarity=PNP, Power Dissipation=460mW, Radiation Hardening=No, REACH SVHC=Yes, RoHS=Compliant, Schedule B="8541210080, 8541210080", Transition Frequency=100MHz, Width=1.35mm
Q2: library part CMP-013-00065-1, "MOSFET P-CH 250V 430MA SOT223-4 P-Channel 250 V 430mA (Ta) 1.8W (Ta) Surface Mount PG-SOT223-4", Case/Package=SOT-223, Continuous Drain Current (ID)=430mA, Drain to Source Breakdown Voltage=-250V, Drain to Source Resistance=4Ω, Gate to Source Voltage (Vgs)=20V, Input Capacitance=210pF, Max Operating Temperature=150°C, Max Power Dissipation=1.8W, Min Breakdown Voltage=250V, Min Operating Temperature=-55°C, Package Quantity=1000, China RoHS=Compliant, Drain to Source Voltage (Vdss)=-250V, Element Configuration=Single, Fall Time=67ns, Halogen Free="Halogen Free", Height=1.6mm, Lead Free="Lead Free", Length=6.5mm, Lifecycle Status=Production, Max Dual Supply Voltage=-250V, Mounting Technology="Surface Mount", Nominal Vgs=2V, Number of Elements=1, Number of Terminals=4, On-State Resistance=4Ω, Packaging="Tape & Reel", Pins=4, Power=1.8W, Power Dissipation=1.8W, Rds On Max=4Ω, REACH SVHC=Yes, Rise Time=11.1ns, RoHS=Compliant, RoHS Compliant=Yes, Schedule B="8541290080, 8541290080", Transistor Type=MOSFET, Turn-Off Delay Time=254ns, Turn-On Delay Time=5.7ns, Width=3.5mm
Q3: library part CMP-013-00061-1, "N-Channel 250 V 0.165 Ohm Surface Mount STripFet II Power MosFet - TO-252-3", Case/Package=DPAK, Continuous Drain Current (ID)=17A, Drain to Source Resistance=165mΩ, Drain to Source Voltage (Vdss)=250V, Gate to Source Voltage (Vgs)=20V, Input Capacitance=1nF, Max Operating Temperature=175°C, Max Power Dissipation=110W, Min Operating Temperature=-55°C, China RoHS=Non-Compliant, Fall Time=8.8ns, Lead Free="Lead Free", Lifecycle Status=Production, Min Breakdown Voltage=250V, Mounting Technology="Surface Mount", Number of Elements=1, Number of Terminals=2, Packaging="Tape and Reel", Pins=3, Power Dissipation=110W, Radiation Hardening=No, Rds On Max=165mΩ, REACH SVHC=No, Rise Time=17.2ns, RoHS=Compliant, Schedule B=8541290080, Turn-Off Delay Time=21ns, Turn-On Delay Time=8.8ns
Q4: library part CMP-013-00066-1, "Transistor MOSFET P-CH 30V 27.8A 8-Pin SOIC", Continuous Drain Current (ID)=27.8A, Drain to Source Resistance=4.9mΩ, Max Operating Temperature=150°C, Max Power Dissipation=5.6W, Min Breakdown Voltage=30V, Min Operating Temperature=-55°C, Lifecycle Status=Production, Number of Elements=1, Number of Terminals=8, REACH SVHC=Yes, RoHS=Compliant, Schedule B="8541290080, 8541290080"
Q5: library part CMP-013-00044-4, "Small Signal Bipolar Transistor, 0.5A I(C), 45V V(BR)CEO, 1-Element, NPN, Silicon", Case/Package=SOT-23-3, Frequency=100MHz, Max Operating Temperature=150°C, Min Operating Temperature=-55°C, Power=300mW, Mounting Technology=SMD/SMT, Pins=3, RoHS Compliant=Yes, Transistor Type=BJT
R1: library part CMP-009-00230-1, "Fixed Resistor, Metal Glaze/thick Film, 0.1W, 12000ohm, 75V, 1% +/-Tol, 100ppm/Cel, Surface Mount, 0603", Case/Package=0603, Max Operating Temperature=155°C, Min Operating Temperature=-55°C, Package Height=0.45mm, Package Length=1.6mm, Package Shape=Rectangular, Package Style=SMTMeter, Package Width=0.8mm, Power=100mW, Rated Temperature=70°C, Resistor Type="FIXED RESISTOR", Temperature Coefficient=100ppm/°C, Tolerance=1%, Voltage Rating=75V, Construction=Rectangular, JESD-609 Code=e3, Mounting Technology="Surface Mount", Packaging="Tape and Reel", Pins=2, Reach SVHC Compliant=Yes, Reference Standard=AEC-Q200, RoHS Compliant=Yes, Technology="METAL GLAZE/THICK FILM", Terminal Finish=Nickel, Termination=Wraparound, Working Voltage=75V
R2: library part CMP-00401-2, "Res Thick Film 0603 7.5 Ohm 1% 0.1W(1/10W) ±200ppm/C Pad SMD T/R Automotive AEC-Q200", Case Code (Imperial)=0603, Case Code (Metric)=1608, Max Operating Temperature=155°C, Max Power Dissipation=100mW, Min Operating Temperature=-55°C, Temperature Coefficient=200ppm/°C, Tolerance=1%, Voltage Rating=75V, Case/Package=0603, China RoHS=Non-Compliant, Composition="Thick Film", Features="Automotive AEC-Q200, Moisture Resistant", Height=450µm, Length=1.6002mm, Lifecycle Status=Production, Mounting Technology="Surface Mount", Number of Terminals=2, Number of Terminations=2, Packaging="Tape & Reel", Pins=2, Power=100mW, Power Dissipation=100mW, Power Rating=100mW, REACH SVHC=Yes, RoHS=Compliant, RoHS Compliant=Yes, Termination=SMD/SMT, Width=800µm, Working Voltage=75V
R3: library part CMP-009-00244-1, "Fixed Resistor, Metal Glaze/thick Film, 0.1W, 20000ohm, 75V, 1% +/-Tol, 100ppm/Cel, Surface Mount, 0603", Case/Package=0603, Max Operating Temperature=155°C, Min Operating Temperature=-55°C, Package Height=0.45mm, Package Length=1.6mm, Package Shape=Rectangular, Package Style=SMTMeter, Package Width=0.8mm, Power=100mW, Rated Temperature=70°C, Resistor Type="FIXED RESISTOR", Temperature Coefficient=100ppm/°C, Tolerance=1%, Voltage Rating=75V, Construction=Rectangular, JESD-609 Code=e3, Mounting Technology="Surface Mount", Packaging="Tape and Reel", Pins=2, Reach SVHC Compliant=Yes, Reference Standard=AEC-Q200, RoHS Compliant=Yes, Technology="METAL GLAZE/THICK FILM", Terminal Finish=Nickel, Termination=Wraparound, Working Voltage=75V
R4: library part CMP-009-00356-2, "Fixed Resistor, Metal Glaze/thick Film, 0.5W, 1.5e+06ohm, 2000V, 1% +/-Tol, 100ppm/Cel, Surface Mount, 2010", Case/Package=2010, Max Operating Temperature=155°C, Min Operating Temperature=-55°C, Power Dissipation=500mW, Temperature Coefficient=100ppm/°C, Tolerance=1%, Working Voltage=2kV, Height=640µm, Lifecycle Status=Production, Mounting Technology="Surface Mount", Number of Terminals=2, RoHS=Compliant, Width=2.54mm
R5: library part CMP-00408-2, "Fixed Resistor, Thick Film, 1.25W, 220000ohm, 400V, 1% +/-Tol, 100ppm/Cel, Surface Mount, 2010", Ambient Temperature Range High=70°C, Case/Package=2010, Max Operating Temperature=155°C, Min Operating Temperature=-55°C, Operating Supply Voltage=400V, Power=1.25W, Temperature Coefficient=100ppm/°C, Tolerance=1%, China RoHS=Non-Compliant, Composition="Thick Film", Height=550µm, Lifecycle Status=Production, Mounting Technology="Surface Mount", Number of Terminals=2, Packaging="Cut Tape", Pins=2, Power Dissipation=1.25W, Power Rating=1.25W, REACH SVHC=Yes, RoHS=Compliant, Voltage Rating=400V, Voltage Rating (DC)=400V, Width=2.5mm, Working Voltage=400V
R6: library part CMP-009-00257-2, "Fixed Resistor, Metal Glaze/thick Film, 0.1W, 5600ohm, 75V, 1% +/-Tol, 100ppm/Cel, Surface Mount, 0603", Case/Package=0603, Max Operating Temperature=155°C, Min Operating Temperature=-55°C, Package Height=0.45mm, Package Length=1.6mm, Package Shape=Rectangular, Package Style=SMTMeter, Package Width=0.8mm, Power=100mW, Rated Temperature=70°C, Resistor Type="FIXED RESISTOR", Temperature Coefficient=100ppm/°C, Tolerance=1%, Voltage Rating=75V, Construction=Rectangular, JESD-609 Code=e3, Mounting Technology="Surface Mount", Packaging="Tape and Reel", Pins=2, Reach SVHC Compliant=Yes, Reference Standard=AEC-Q200, RoHS Compliant=Yes, Technology="METAL GLAZE/THICK FILM", Terminal Finish=Nickel, Termination=Wraparound, Working Voltage=75V
R7: library part CMP-00199-2, "Fixed Resistor, Metal Glaze/thick Film, 0.1W, 3300ohm, 75V, 0.5% +/-Tol, 50ppm/Cel, Surface Mount, 0603", Case/Package=0603, Max Operating Temperature=125°C, Min Operating Temperature=-55°C, Power=100mW, Rated Temperature=70°C, Tolerance=0.5%, Voltage Rating=75V, Working Voltage=50V, Mounting Technology="Surface Mount", Pins=2, RoHS Compliant=Yes
R8 R12: library part CMP-009-00018-11, "Chip Resistor, 10 KOhm, +/- 1%, 125 mW, -55 to 155 degC, 0805 (2012 Metric)", Case/Package=0805, Max Operating Temperature=155°C, Min Operating Temperature=-55°C, Power=125mW, Tolerance=1%, Voltage Rating=150V, Mounting Technology=SM, Pins=2, RoHS Compliant=True
R9: library part CMP-00400-2, "Fixed Resistor, Metal Glaze/thick Film, 0.5W, 0.025ohm, 0.1118V, 1% +/-Tol, 1000ppm/Cel, Surface Mount, 1210", Case/Package=1210, Max Operating Temperature=155°C, Max Power Dissipation=500mW, Min Operating Temperature=-55°C, Temperature Coefficient=1000ppm/°C, Tolerance=1%, Voltage Rating=111.8mV, China RoHS=Non-Compliant, Composition="Thick Film", Features="Moisture Resistant", Height=550µm, Lead Free="Lead Free", Length=3.0988mm, Lifecycle Status=Production, Mounting Technology="Surface Mount", Number of Terminals=2, Number of Terminations=2, Pins=2, Power=500mW, Power Dissipation=500mW, Power Rating=500mW, REACH SVHC=Yes, RoHS=Compliant, Width=2.6mm, Working Voltage=111.8mV
R11: library part CMP-00393-1, "Res Thick Film 2010 390K Ohm 1% 0.75W(3/4W) ±100ppm/C Pad SMD Automotive T/R", Ambient Temperature Range High=70°C, Case/Package=2010, Max Operating Temperature=155°C, Min Operating Temperature=-55°C, Operating Supply Voltage=200V, Power Dissipation=750mW, Temperature Coefficient=100ppm/°C, Tolerance=1%, China RoHS=Non-Compliant, Composition="Thick Film", Height=550µm, Lifecycle Status=Production, Mounting Technology="Surface Mount", Number of Terminals=2, Packaging="Cut Tape", Pins=2, Power Rating=750mW, REACH SVHC=Yes, RoHS=Compliant, Schedule B=8533210025, Voltage Rating=200V, Voltage Rating (DC)=200V, Width=2.5mm, Working Voltage=200V
R13: library part CMP-009-00239-1, "Fixed Resistor, Metal Glaze/thick Film, 0.25W, 150000ohm, 200V, 1% +/-Tol, 100ppm/Cel, Surface Mount, 1206", Case/Package=1206, Max Operating Temperature=155°C, Min Operating Temperature=-55°C, Package Height=0.55mm, Package Length=3.2mm, Package Shape=Rectangular, Package Style=SMTMeter, Package Width=1.6mm, Power=250mW, Rated Temperature=70°C, Resistor Type="FIXED RESISTOR", Temperature Coefficient=100ppm/°C, Tolerance=1%, Working Voltage=200V, Additional Feature="RATED AC VOLTAGE (V): 200", Construction=Chip, JESD-609 Code=e3, Mounting Technology="Surface Mount", Packaging="Tape and Reel", Pins=2, Reach SVHC Compliant=Yes, Reference Standard=AEC-Q200, RoHS Compliant=Yes, Technology="METAL GLAZE/THICK FILM", Terminal Finish=Nickel, Termination=Wraparound
R14: library part CMP-00406-2, "Res Thick Film 1210 470 Ohm 1% 0.75W(3/4W) ±100ppm/C Pad SMD Automotive T/R", Case Code (Imperial)=1210, Case Code (Metric)=3225, Max Operating Temperature=155°C, Max Power Dissipation=750mW, Min Operating Temperature=-55°C, Temperature Coefficient=100ppm/°C, Tolerance=1%, Voltage Rating=200V, Case/Package=1210, China RoHS=Non-Compliant, Composition="Thick Film", Features="Automotive AEC-Q200", Height=600µm, Lead Free="Lead Free", Length=3.2004mm, Lifecycle Status=Production, Mounting Technology="Surface Mount", Number of Terminals=2, Number of Terminations=2, Pins=2, Power=750mW, Power Dissipation=750mW, Power Rating=750mW, REACH SVHC=Yes, RoHS=Compliant, Weight=18.001947mg, Width=2.5mm, Working Voltage=200V
R15: library part CMP-009-00031-13, "Chip Resistor, 4.7 KOhm, +/- 1%, 0.1 W, -55 to 155 degC, 0603 (1608 Metric)", Case/Package=0603, Max Operating Temperature=155°C, Min Operating Temperature=-55°C, Power=100mW, Tolerance=1%, Mounting Technology=SM, Pins=2, RoHS Compliant=True
TR1: library part CMP-009-00358-1, "Cermet trimmer potentiometer, 12 turns, 5 kΩ, 0.25 W, THT, on top, 3266W-1-502LF", Case/Package=Radial, Color=Blue, Max Operating Temperature=125°C, Max Power Dissipation=250mW, Min Operating Temperature=-55°C, Temperature Coefficient=100ppm/°C, Tolerance=10%, Voltage Rating=300V, Composition="Cermet, Potentiometer", Contact Plating=Tin, Depth=4.5mm, Height=7.24mm, Lead Diameter=460µm, Lead Length=4.88mm, Length=6.71mm, Lifecycle Status=Production, Military Standard=Not, Mounting Technology="PCB, Through Hole", Number of Terminals=3, Number of Turns=12, Pins=3, Pitch=2.54mm, Power=250mW, Power Dissipation=250mW, Power Rating=250mW, Radiation Hardening=No, REACH SVHC=No, RoHS=Compliant, Schedule B="8533400080, 8533400080", Taper=Linear, Termination=Pin, Type=Potentiometer, Voltage Rating (DC)=300V, Weight=425mg, Width=4.5mm, Working Voltage=300V
U1: library part CMP-019-00098-2, "DC-DC Switching Boost (Step Up) Regulator, Adjustable, 2 V-16.5 Vin, 2V-12Vout, 2Aout, SOIC-8", Frequency=300kHz, Manufacturer Lifecycle Status=PRODUCTION, Max Operating Temperature=70°C, Min Operating Temperature=0°C, Output Current=2A, Output Voltage=2V, Evaluation Kit=Yes, Lead Free="Lead Free", Lifecycle Status=Production, Number of Channels=1, Number of Outputs=1, Packaging="Cut Tape", Pins=8, RoHS=Compliant, Schedule B=8542310000
U2: library part CMP-00399-1, "Comparator Single R-R I/O 5.5V 5-Pin SOT-23 T/R Automotive AEC-Q100", Case/Package=SOT-23, Input Bias Current=1pA, Input Offset Voltage (Vos)=7mV, Max Operating Temperature=85°C, Max Supply Current=1mA, Max Supply Voltage=5.5V, Min Operating Temperature=-40°C, Min Supply Voltage=1.6V, Natural Thermal Resistance=256°C/W, Output Current=2mA, Power Supply Rejection Ratio (PSRR)=80dB, Quiescent Current=1µA, Channels=1, Common Mode Rejection Ratio=70dB, Contact Plating=Tin, Country of Assembly=Thailand, Country of Fabrication="United States of America", Country of Origin=Thailand, Export Control Classification Number (ECCN) Code=EAR99, Harmonized Tariff Schedule (HTS) Code=8542.33.0001, Height=1.3mm, Hysteresis=6.5mV, Introduction Date=2003-03-14, Lead Free="Lead Free", Length=3.1mm, Lifecycle Status=Production, Max Input Current=1pA, Mounting Technology="Surface Mount", Nominal Supply Current=1mA, Number of Channels=1, Number of Elements=1, Output Current per Channel=2mA, Output Type=Push-Pull, Pins=5, Projected EOL Date=2034-03-14, Propagation Delay=8µs, Radiation Hardening=No, Response Time=4µs, RoHS=Compliant, RoHS Compliant=Yes, Schedule B="8542330000, 8542330000", Type="General Purpose", Width=1.8mm
U3: library part CMP-00395-1, "Standard Regulator Pos 3.3V 0.5A 4-Pin(3+Tab) SOT-223 Tube", Case/Package=SOT-223, Dropout Voltage=2V, Manufacturer Lifecycle Status=ACTIVE, Max Operating Temperature=125°C, Max Output current=500mA, Max Supply Voltage=25V, Min Input Voltage=5.3V, Min Operating Temperature=-40°C, Output Voltage=3.3V, Power Supply Rejection Ratio (PSRR)=80dB, Quiescent Current=4.5mA, Height=1.8mm, Lead Free="Lead Free", Length=6.5mm, Lifecycle Status=Production, Mounting Technology="Surface Mount", Number of Outputs=1, Number of Regulators=1, Output Current=500mA, Output Type=Fixed, Packaging=Rail/Tube, Pins=4, Polarity=Positive, Radiation Hardening=No, RoHS=Compliant, Thickness=1.6mm, Width=3.5mm

## Free pads (board coordinates)
  round 7 hole 7 unplated: 1(7,7) 2(48,7)

## Via types
v1: diameter 0.6, hole 0.3, Top Layer to Bottom Layer, tented both sides, 92 vias

## Nets (pads, with @x,y where several pads share a name; then routed paths per layer and width w, separated by ;. In a path a pad name is that pad's centre, name@x,y a point inside that pad or via, vN(x,y) a via of type N, cw(c..) or ccw(c..) an arc to the next point about the centre after c; other vN are vias at no path point)
!HV_SHDN: J1.33 J1.34 R15.2 | length 50.6
  Top Layer w0.3: v1(24.575,14.343) 24.575,13.021 26.262,11.333 35.542,11.333 36.969,12.76 36.969,29.298 41.9,34.229 44.237,34.229 45.211,33.255 J1.34 J1.33
  Bottom Layer w0.3: R15.2 23.975,13.743 v1(24.575,14.343)
+3V3: C14.1 C15.1 J1.25 J1.26 J1.27 J1.28 J1.29 J1.30 J1.31 J1.32 R1.2 U2.2 U3.3 | length 27.8
  Top Layer w0.8: J1.31 53.435,31.985 v1(53.946,32.496)
  Bottom Layer w0.3: C15.1 50.259,36.611 50.259,36.272 50.098,36.111 49.684,36.111 48.986,35.413 48.986,34.525 49.464,34.047 U2.2 51.985,34.047 R1.2
  Bottom Layer w0.8: C14.1@43.976,48.012 43.976,45.9 44.076,45.8 46.945,45.8 47.6,45.145 47.6,42.271 50.509,39.362 C15.1 ; R1.2 53.587,33.997 53.946,33.638 v1(53.946,32.496) v1@53.945,32.497
+9V: C13.1 D3.2 J3.1 Q4.1 Q4.2 Q4.3 R8.2 U3.1 | length 47.6
  Top Layer w0.8: J3.1 39.154,3.1 39.65,3.596 39.65,5.71 41.052,7.112 41.052,11.333 40.576,11.809 v1(40.576,22.918)
  Bottom Layer w0.8: v1(40.576,22.918) D3.2 ; D3.2@40.576,41.875 41.251,41.2 U3.1@44.076,41.2 ; C13.1 43.976,41.1 U3.1@44.076,41.2 ; U3.1@44.661,41.3 U3.1 U3.1@44.076,41.2
+100V: D2.1 J1.13 J1.14 J1.15 J1.16 J1.17 J1.18 J1.19 J1.20 R13.2 | length 12.8
  Top Layer w0.8: v1(42.485,24.001) 46.162,24.001 46.47,24.309 46.47,24.335 47.435,24.335 J1.20
  Bottom Layer w0.8: v1(42.485,24.001) 42.566,24.001 43.099,24.534 44.024,24.534 D2.1 44.89,27.176 45.322,27.608 R13.2
+HV: J1.1 J1.2 J1.3 J1.4 J1.5 J1.6 J1.7 J1.8 Q2.2 Q2.4 R5.2 R13.1 | length 27.2
  Bottom Layer w0.8: R5.2 50.387,30.587 50.387,27.632 R13.1 53.279,27.608 54.172,26.715 54.172,17.352 53.587,16.766 v1@50.758,16.766 ; Q2.4 50.758,12.301 v1@50.758,16.766 ; Q2.2 50.422,17.101 v1@50.758,16.766 ; v1(50.672,16.726) 50.712,16.766 v1@50.758,16.766
CS: Q3.3 R9.2 U1.8
EXT: Q3.1 U1.1
FAULT: J1.37 J1.38 U2.1 | length 10.1
  Top Layer w0.3: J1.38 J1.37 v1(53.826,35.795)
  Bottom Layer w0.3: U2.1 53.029,34.997 v1(53.826,35.795)
FB: R4.1 TR1.3 U1.3 | length 11.6
  Bottom Layer w0.3: R4.1 12.32,15.041 12.745,15.466 13.814,15.466 15.181,16.833 TR1.3 17.164,19.79 17.449,20.075 U1.3
GND: C1.2 C2.2 C3.2 C4.2 C5.2 C6.2 C7.2 C8.2 C9.2 C10.2 C11.2 C12.2 C13.2 C14.2 C15.2 D2.2 D3.1 J1.9 J1.10 J1.11 J1.12 J1.21 J1.22 J1.23 J1.24 J1.35 J1.36 J1.39 J1.40 J2.1 J2.2 J2.3 J2.4 J2.5 J2.6 J2.7 J2.8 J2.9 J2.10 J2.11 J2.12 J2.13 J2.14 J2.15 J2.16 J2.17 J2.18 J2.19 J2.20 J2.21 J2.22 J2.23 J2.24 J2.25 J2.26 J2.27 J2.28 J2.29 J2.30 J2.31 J2.32 J2.33 J2.34 J2.35 J2.36 J2.37 J2.38 J2.39 J2.40 J3.2 J3.3 Q5.2 R3.1 R7.1 R9.1 R11.1 R12.1 R14.1 U1.4 U1.6 U1.7 U2.5 U3.2 U3.4 | length 51.2
  Top Layer w0.3: 45.401,18.692 45.455,18.692 45.827,19.065 47.245,19.065 J1.12 ; J1.22 v1(49.5,25.635) J1.21 ; J1.24 J1.23 ; J1.36 J1.35
  Bottom Layer w0.254: v1(48.839,38.155) 48.839,36.882 C15.2
  Bottom Layer w0.3: C1.2@5.35,31.351 5.5,31.201 v1(5.5,30.045) ; v1(9.42,11.6) R12.1 ; v1(9.745,16.775) C12.2 ; v1(19.359,17.737) U1.4 ; v1(21.975,18.477) 21.975,19.652 C11.2 ; Q5.2 v1(25.573,10.965) ; v1(26.691,14.393) 27.545,14.393 27.97,14.818 R14.1 v1(27.97,17.656) ; D3.1 v1(40.576,47.1) ; v1(41.694,28.383) R7.1 ; v1(42.695,43.489) U3.2@44.55,43.489 ; C9.2 v1(43.698,32.903) ; U3.2 U3.2@44.55,43.489 ; R11.1 v1(44.999,14.943) ; v1(45.1,35.872) 45.101,35.874 46.353,35.874 R3.1 ; C14.2 v1(45.626,49.299) ; C13.2 v1(46.938,38.987) ; v1(46.405,43.489) U3.2@44.55,43.489 ; D2.2 49.265,25.4 v1(49.5,25.635) ; U2.5 48.036,35.963 48.839,36.766 C15.2@48.839,36.882 ; v1(50.561,41.1) U3.4 ; v1(50.561,45.9) U3.4 ; v1(52.476,43.5) U3.4
  other v1: 23.597,17.659 24.714,17.659 25.772,17.659 26.83,17.659 28.97,17.737 30.087,17.737 31.145,17.737 32.203,17.737 10.764,18.595 11.612,18.595 23.606,18.684 27.763,18.778 28.97,18.778 23.606,19.742 27.763,19.788 28.97,19.788 23.606,20.792 27.763,20.798 28.97,20.798 10.07,21.343 10.918,21.345 11.767,21.345 12.615,21.345 23.606,21.847 24.597,21.847 25.655,21.847 26.713,21.847 27.763,21.847 28.97,21.847 30.028,21.847 31.086,21.847 32.144,21.847 1.174,33.558 1.174,34.549 1.174,35.608 1.174,36.666 1.174,37.716 1.174,38.774 1.174,39.832 1.174,40.823 1.174,41.873 1.174,42.923 1.174,43.973 1.174,45.023 1.174,46.073 3.061,48.093 4.119,48.093 5.177,48.093 6.227,48.093 7.218,48.093 8.277,48.093 9.335,48.093 10.385,48.093 11.376,48.093 12.434,48.093 13.492,48.093 14.542,48.093 15.534,48.093 16.592,48.093 17.65,48.093 18.7,48.093 19.75,48.093
NetC9_1: C9.1 R5.1 R7.2 U2.4 | length 8.6
  Bottom Layer w0.3: R7.2 44.087,29.631 C9.1 45.138,30.019 45.563,30.444 R5.1 47.463,30.611 48.036,31.185 U2.4
NetQ1_1: Q1.1 Q2.3 R2.2 | length 4.2
  Bottom Layer w0.3: Q1.1 51.868,22.411 51.868,20.902 R2.2 51.876,19.763 52.722,18.916 Q2.3
NetQ1_3: Q1.3 Q2.1 R6.1 R11.2 | length 14.8
  Top Layer w0.3: v1(44.999,19.82) 45,19.821 45,22.019 v1(44.999,22.02)
  Bottom Layer w0.3: v1(44.999,19.82) R11.2 48.034,18.477 Q2.1 ; v1(44.999,22.02) 47.61,22.02 48.05,22.46 48.923,22.46 R6.1 48.963,24.038 49.244,24.318 Q1.3
NetQ4_4: Q4.4 Q5.3 R8.1 | length 6.6
  Bottom Layer w0.3: Q5.3 23.525,7.7 23.805,7.42 Q4.4 26.565,5.555 R8.1
NetQ5_1: Q5.1 R15.1 | length 1.6
  Bottom Layer w0.3: Q5.1 R15.1
NetR1_1: R1.1 R3.2 U2.3 | length 6.5
  Bottom Layer w0.3: R3.2 46.604,34.275 47.009,34.275 47.236,34.047 48.577,34.047 49.352,33.272 50.261,33.272 U2.3 50.563,32.97 51.2,32.97 51.371,32.799 51.734,32.799 R1.1
NetR12_2: R12.2 TR1.1 TR1.2 | length 8.2
  Bottom Layer w0.3: R12.2 14.009,11.6 14.624,12.215 TR1.2 TR1.1
REF: C12.1 U1.5 | length 3.9
  Bottom Layer w0.3: C12.1 12.545,16.811 12.545,18.5 12.85,18.805 U1.5
SW_NODE: D1.2 L1.2 Q3.4
VBOOST: C1.1 C3.1 C4.1 C5.1 C6.1 C7.1 C8.1 D1.1 Q1.2 R2.1 R4.2 R6.2 | length 53
  Bottom Layer w0.3: R2.1@50.511,20.945 50.511,22.368 Q1.2
  Bottom Layer w0.8: C7.1 18.775,42.1 20.1,42.1 20.349,41.851 35.874,41.851 36.9,40.825 36.9,22.272 38.251,20.92 R6.2 48.976,20.908 R2.1@50.463,20.908 ; R2.1 R2.1@50.463,20.908 ; R2.1@50.511,20.945 50.474,20.908 R2.1@50.463,20.908
VIN: C2.1 C10.1 C11.1 L1.1 Q4.5 Q4.6 Q4.7 Q4.8 R14.2 U1.2 | length 15.9
  Bottom Layer w0.8: U1.2@19.359,21.321 C11.1 21.995,24.558 23.157,25.72 C10.1 C2.1 C2.1@31.545,25.72

## Polygon pours and split planes (outlines as drawn)
GND on Bottom Layer "NONET_L-01_P-001" (solid, pour order 1): 15.848,21.996 9.747,21.996 9.747,19.399 15.849,19.399
GND on Bottom Layer "NONET_L-01_P-001" (solid, pour order 22): 9.747,19.417 9.747,17.659 12.1,17.659 12.1,19.417
CS on Bottom Layer "NONET_L-01_P-001" (solid, pour order 0): 9.745,22.147 15.884,22.147 15.884,27.734 15.843,27.775 9.745,27.775
VIN on Bottom Layer "NONET_L-01_P-001" (solid, pour order 3): 35.056,22.462 35.056,36.861 29.749,36.861 29.749,26.922 29.749,22.458
VIN on Bottom Layer "NONET_L-01_P-001" (solid, pour order 6): 35.056,22.531 35.056,12.11 26.113,12.11 26.113,13.903 30.039,13.903 30.039,16.938 32.863,16.938 32.863,22.527
+9V on Bottom Layer "NONET_L-01_P-001" (solid, pour order 7): 40.1,2.215 40.1,5 33.838,5 30.92,8.21 27.35,8.21 27.35,6.56 28.183,6.029 28.183,3.901 29.898,2.185
EXT on Bottom Layer "NONET_L-01_P-001" (solid, pour order 8): 20.5,22.295 20.5,26.905 17.288,26.905 17.288,22.295
SW_NODE on Bottom Layer "NONET_L-01_P-001" (solid, pour order 9): 13.209,28.833 23.363,28.833 23.363,36.973 23.346,36.973 20.668,39.651 16.259,39.651 16.259,35.252 13.207,35.252
VBOOST on Bottom Layer "NONET_L-01_P-001" (solid, pour order 10): 15.736,35.795 15.736,39.538 15.736,41.45 20.75,41.45 20.75,45.246 20.491,45.246 3.996,45.246 3.996,40.573 3.996,32.725 6.146,32.725 6.378,32.494 6.378,30.541 9.023,30.541 9.023,35.795
VBOOST on Bottom Layer "NONET_L-01_P-001" (solid, pour order 13): 6.378,30.905 6.378,12.3 9.023,12.3 9.023,30.905
GND on Bottom Layer "NONET_L-01_P-001" (solid, pour order 14): 32.65,17.251 32.65,22.147 23.307,22.147 23.307,17.251
GND on Bottom Layer "NONET_L-01_P-001" (solid, pour order 15): 3.996,49.256 3.996,46 20.75,46 20.75,49.256
GND on Bottom Layer "NONET_L-01_P-001" (solid, pour order 16): 0.173,32.715 2.906,32.715 2.906,49.264 0.173,49.264
GND on Bottom Layer "NONET_L-01_P-001" (solid, pour order 17): 2.362,49.266 2.362,46 16.122,46 16.122,49.266
GND on Bottom Layer "NONET_L-01_P-001" (solid, pour order 21): 2.906,32.053 5.84,32.053 5.84,30.65 0.408,30.65 0.408,32.903 2.906,32.903
+3V3 on Top Layer "NONET_L-01_P-001" (solid, pour order 12): 53.031,27.704 53.03,27.703 45.968,27.703 45.968,32.457 53.031,32.457